# EAGLE board WCRL_Board_V4 (EAGLE 9.6.2)
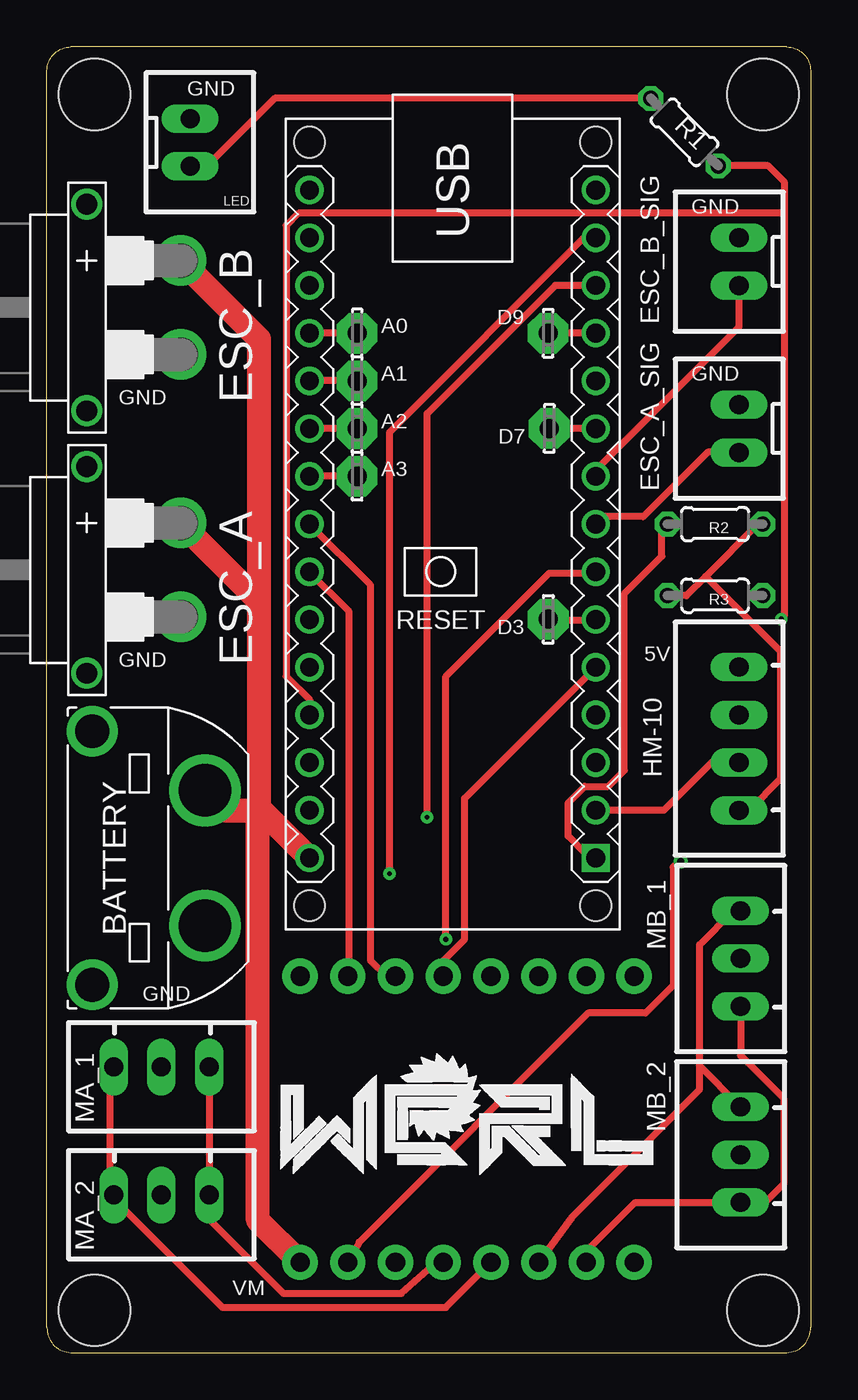
[diagram p0: board, top side]
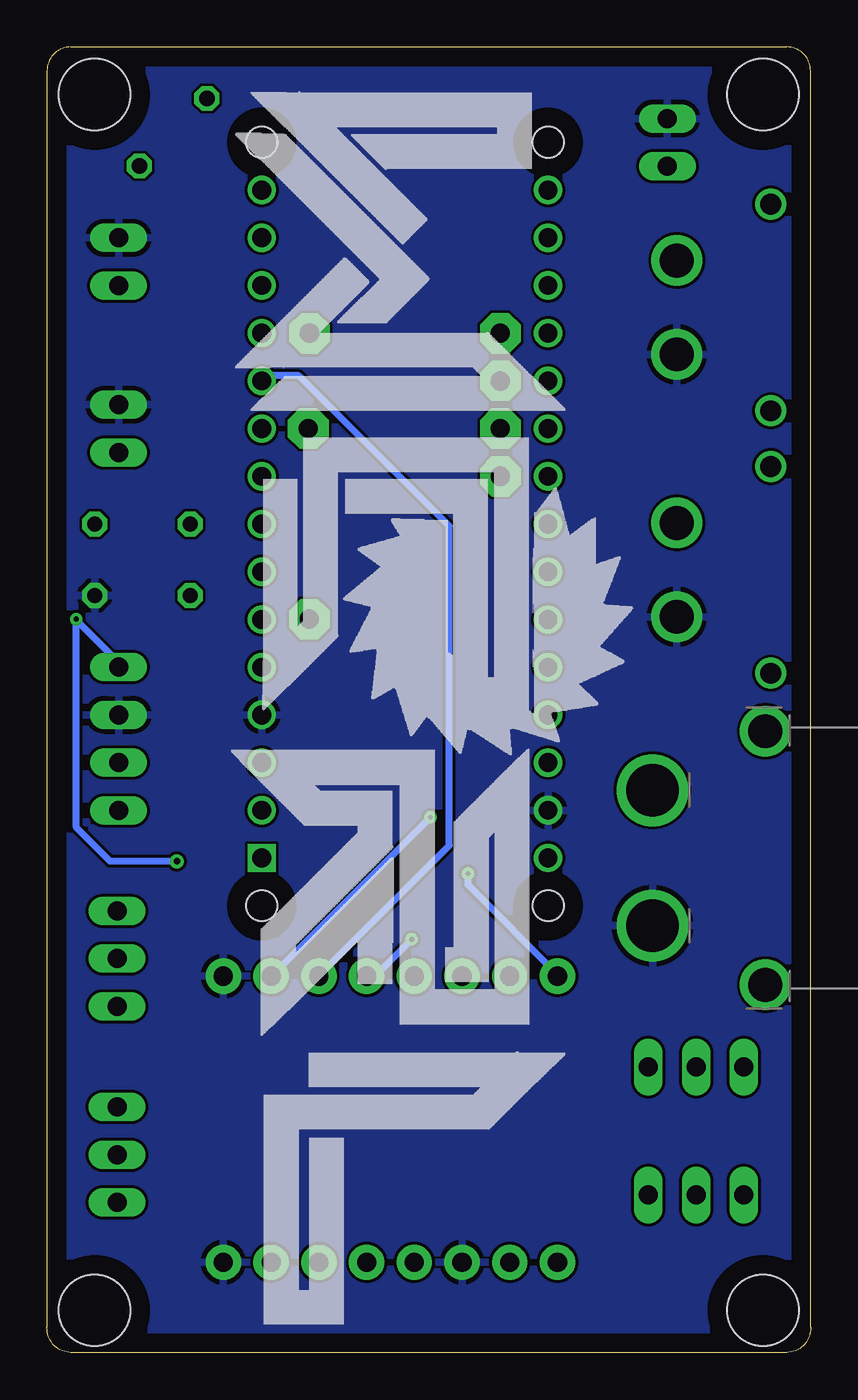
[diagram p1: board, bottom side, seen from below]

Size 40.64 x 69.51 mm. Coordinates in mm from the lower left corner, seen from the top.
Outline: 40.64,68.24 40.64,1.34 arc-90 39.37,0 1.27,0 arc-90 0,1.34 0,68.24 arc-90 1.27,69.51 39.37,69.51 arc-90 40.64,68.24
Copper layers (1*16): Top 0.035mm / dielectric 1.5mm / Bottom 0.035mm
Design rules "default *": minimum track width 6mil, minimum drill 0.35mm, track to track 6mil, track to pad 10mil, pad to pad 6mil, via to via 6mil, smd to smd 6mil, copper to edge 40mil, drill to drill 6mil, minimum pad ring 10mil, minimum via ring 8mil, stop-mask expansion 4mil, vias tented up to drill 0mil, thermal gap 10mil
Holes 3.81 mm at 2.54,66.97 38.1,2.25 2.54,2.25 38.1,66.97

## Footprints (pad centres in the part's own frame; a part is rotated, then mirrored left to right if it is on the bottom)
LSP10 = drill 1.016 pad 2.159 octagon: MP 0,0
XT60PW-F = drill 2.8: + -3.6,0; - 3.6,0 | drill 1.8: P$3 -6.75,6; P$4 6.75,6
XT30PW-F = drill 1.8: + 2.5,0; - -2.5,0 | drill 1.1: P$3 -5.5,5; P$4 5.5,5
JST-XH-02-PACKAGE-LONG-PAD = drill 1.016 long: 1 -1.27,0; 2 1.27,0
JST-XH-04-PACKAGE-LONG-PAD = drill 1.016 long: 1 -3.81,0; 2 -1.27,0; 3 1.27,0; 4 3.81,0
1X08_NO_SILK = drill 1.016 pad 1.88: 1 0,0; 2 2.54,0; 3 5.08,0; 4 7.62,0; 5 10.16,0; 6 12.7,0; 7 15.24,0; 8 17.78,0
ARDUINO-NANO-3.0 = drill 1 square: J1.1 17.78,7.62 | drill 1: J1.2 15.24,7.62; J1.3 12.7,7.62; J1.4 10.16,7.62; J1.5 7.62,7.62; J1.6 5.08,7.62; J1.7 2.54,7.62; J1.8 0,7.62; J1.9 -2.54,7.62; J1.10 -5.08,7.62; J1.11 -7.62,7.62; J1.12 -10.16,7.62; J1.13 -12.7,7.62; J1.14 -15.24,7.62; J1.15 -17.78,7.62; J2.1 17.78,-7.62; J2.2 15.24,-7.62; J2.3 12.7,-7.62; J2.4 10.16,-7.62; J2.5 7.62,-7.62; J2.6 5.08,-7.62; J2.7 2.54,-7.62; J2.8 0,-7.62; J2.9 -2.54,-7.62; J2.10 -5.08,-7.62; J2.11 -7.62,-7.62; J2.12 -10.16,-7.62; J2.13 -12.7,-7.62; J2.14 -15.24,-7.62; J2.15 -17.78,-7.62 | hole 1.651: -20.32,7.62; -20.32,-7.62; 20.32,-7.62; 20.32,7.62
JST-XH-03-PACKAGE-LONG-PAD = drill 1.016 long: 1 -2.54,0; 2 0,0; 3 2.54,0
0204/5 = drill 0.813 octagon: 1 -2.54,0; 2 2.54,0

## Placement (x,y rotation side)
A0  LSP10  [LSP10]  16.51,54.27 270 top
A1  LSP10  [LSP10]  16.51,51.73 270 top
A2  LSP10  [LSP10]  16.51,49.19 270 top
A3  LSP10  [LSP10]  16.51,46.65 270 top
BATTERY  XT60PW-F  [XT60PW-F]  8.41,26.33 270 bottom
D3  LSP10  [LSP10]  26.68,39.04 90 top
D7  LSP10  [LSP10]  26.73,49.19 270 top
D9  LSP10  [LSP10]  26.67,54.27 90 top
ESC_A  XT30PW-F  [XT30PW-F]  7.12,41.67 90 top
ESC_A_SIG  JST-XH-02-PIN-LONG-PAD  [JST-XH-02-PACKAGE-LONG-PAD]  36.83,49.19 90 top
ESC_B  XT30PW-F  [XT30PW-F]  7.12,55.64 90 top
ESC_B_SIG  JST-XH-02-PIN-LONG-PAD  [JST-XH-02-PACKAGE-LONG-PAD]  36.83,58.08 90 top
HM-10  JST-XH-04-PIN-LONG-PAD  [JST-XH-04-PACKAGE-LONG-PAD]  36.83,32.68 90 top
J1  [1X08_NO_SILK]  31.25,4.8 180 top
J2  [1X08_NO_SILK]  13.47,20.04 0 top
LED  JST-XH-02-PIN-LONG-PAD  [JST-XH-02-PACKAGE-LONG-PAD]  7.62,64.43 270 top
M1  ARDUINO-NANO-3.0  [ARDUINO-NANO-3.0]  21.59,44.11 270 top
MA_1  JST-XH-03-PIN-LONG-PAD  [JST-XH-03-PACKAGE-LONG-PAD]  6.09,15.2 180 top
MA_2  JST-XH-03-PIN-LONG-PAD  [JST-XH-03-PACKAGE-LONG-PAD]  6.09,8.39 180 top
MB_1  JST-XH-03-PIN-LONG-PAD  [JST-XH-03-PACKAGE-LONG-PAD]  36.91,20.98 90 top
MB_2  JST-XH-03-PIN-LONG-PAD  [JST-XH-03-PACKAGE-LONG-PAD]  36.91,10.53 90 top
R1  200  [0204/5]  33.92,64.97 315 top
R2  1K  [0204/5]  35.56,44.11 0 top
R3  2K  [0204/5]  35.56,40.3 0 top

## Library data of the parts
A0 A1-A3 D3 D7 D9 = solpad
BATTERY ESC_A ESC_B = xt30
ESC_A_SIG ESC_B_SIG HM-10 LED MA_1 MA_2 MB_1 MB_2 = Rembrandt Electronics - JST XH Connectors v1-0
J1 J2 = SparkFun-Connectors; PROD_ID: CONN-08438
M1 = diy-modules
R1-R3 = BeagleBone_Black_Wireless

## Nets
3V3: M1.J2.14
+5V: HM-10.4 J1.7 M1.J2.4 R1.2
+12V: BATTERY.+ ESC_A.+ ESC_B.+ J1.8 M1.J2.1
GND: BATTERY.- ESC_A.- ESC_A_SIG.2 ESC_B.- ESC_B_SIG.2 HM-10.3 J1.1 J1.6 J2.8 LED.1 M1.J1.4 M1.J2.2 R3.2
N$1: D3.MP M1.J1.6
N$2: D7.MP M1.J1.10
N$3: D9.MP M1.J1.12
N$4: HM-10.1 R2.2 R3.1
N$5: ESC_A_SIG.1 M1.J1.8
N$6: ESC_B_SIG.1 M1.J1.9
N$7: M1.J1.1 R2.1
N$8: J2.4 M1.J1.5
N$9: J2.3 M1.J2.8
N$10: J1.5 MA_1.1 MA_2.1
N$11: J1.4 MA_1.3 MA_2.3
N$12: J1.2 MB_1.1 MB_2.1
N$13: J1.3 MB_1.3 MB_2.3
N$14: HM-10.2 M1.J1.2
N$15: J2.2 M1.J2.7
N$16: J2.5 M1.J1.7
N$17: J2.6 M1.J1.11
N$18: LED.2 R1.1
N$20: J2.7 M1.J1.13
N$21: J2.1 M1.J1.14
N$24: A3.MP M1.J2.9
N$25: A1.MP M1.J2.11
N$27: A0.MP M1.J2.12
N$28: A2.MP M1.J2.10

## Tracks (layer width: path | path; a pad name or v marks a point on that pad's centre or on a via)
+5V  (via drill 0.25, 0.35)
  Top 0.381: v39.08,39.05 39.23,39.2 39.23,60.65 | M1.J2.4 13.97,34.76 12.73,36 12.73,60 13.38,60.65 39.23,60.65 | J1.7 16.61,5.88 28.8,18.07 31.86,18.07 33.33,19.55 33.33,25.85 33.63,26.15 v33.73,26.15 | R1.2 38.39,63.19 39.23,62.35 39.23,60.65
  Bottom 0.381: HM-10.4 36.83,36.75 39.1,39.02 v39.08,39.05 39.08,27.95 37.28,26.15 v33.73,26.15
+12V
  Top 1.27: ESC_A.+ 11.28,40.01 | 11.28,40.01 11.28,28.87 | M1.J2.1 11.43,28.87 11.28,28.87 | ESC_B.+ 11.28,53.98 11.28,40.01 | BATTERY.+ 9.47,28.87 11.23,28.87 | 11.23,28.87 11.28,28.87 | 11.23,28.87 11.23,7.04 J1.8
GND
  pour Bottom: 0.78,0.49 39.78,0.49 39.78,68.5 0.78,68.5
N$1
  Top 0.381: M1.J1.6 28.73,39 26.73,39 D3.MP
N$2
  Top 0.381: M1.J1.10 26.74,49.19 D7.MP
N$3
  Top 0.381: D9.MP M1.J1.12
N$4
  Top 0.381: R3.1 34.03,40.3 35.05,41.33 | 35.05,41.33 37.84,44.11 R2.2 | 35.05,41.33 39.03,37.35 39.03,30.53 37.37,28.87 HM-10.1
N$5
  Top 0.381: ESC_A_SIG.1 35.16,47.93 31.73,44.5 29.61,44.5 29.61,44.51 M1.J1.8
N$6
  Top 0.381: ESC_B_SIG.1 36.83,54.6 29.23,47 M1.J1.9
N$7
  Top 0.381: R2.1 32.73,43.82 32.73,42.4 30.73,40.4 30.73,31 29.87,30.14 28.62,30.14 27.73,29.25 27.73,27.5 28.73,26.5 M1.J1.1
N$8
  Top 0.381: M1.J1.5 28.73,36 22.23,29.5 22.23,22 21.09,20.86 J2.4
N$9
  Top 0.381: M1.J2.8 17.23,40.85 17.23,20.85 18.04,20.04 J2.3
N$10
  Top 0.381: MA_1.1 MA_2.1 8.63,7.1 12.58,3.15 18.86,3.15 20.72,4.8 J1.5
N$11
  Top 0.381: MA_1.3 3.35,15 3.35,8.59 MA_2.3 3.35,8.39 9.33,2.4 21.23,2.4 J1.4
N$12
  Top 0.381: J1.2 28.71,5.38 31.32,7.99 MB_2.1 38.22,7.99 39.23,9 39.23,13.5 36.91,15.82 MB_1.1
N$13
  Top 0.381: MB_2.3 34.73,15.25 | J1.3 27.93,7.2 34.73,14 34.73,15.25 | 34.73,15.25 34.73,21.72 36.53,23.52 MB_1.3
N$14
  Top 0.381: M1.J1.2 32.83,28.87 35.39,31.42 35.4,31.41 HM-10.2
N$15
  Top 0.381: M1.J2.7 16.08,39.45 16.08,20.11 J2.2
N$16  (via drill 0.25)
  Top 0.381: v21.23,22 21.23,36 26.73,41.5 28.73,41.5 M1.J1.7
  Bottom 0.381: J2.5 23.39,19.84 v21.23,22
N$17
  Bottom 0.381: M1.J1.11 28.73,52 27.23,52 19.23,44 19.23,27 26.17,20.06 J2.6
N$18
  Top 0.381: R1.1 12.12,66.77 12.12,66.78 8.5,63.16 LED.2
N$20  (via drill 0.25)
  Top 0.381: M1.J1.13 27.04,56.81 20.23,50 v20.23,28.5
  Bottom 0.381: v20.23,28.5 28.69,20.04 J2.7
N$21  (via drill 0.25)
  Top 0.381: v18.23,25.5 18.23,49 28.58,59.35 M1.J1.14
  Bottom 0.381: J2.1 13.47,20.14 18.23,24.9 v18.23,25.5
N$24
  Top 0.381: A3.MP 16.5,46.66 13.98,46.66 M1.J2.9
N$25
  Top 0.381: M1.J2.11 A1.MP
N$27
  Top 0.381: M1.J2.12 A0.MP
N$28
  Top 0.381: A2.MP M1.J2.10

## Text on the board
tNames: GND | GND | GND | GND | GND | 5V | GND | VM